# EAGLE board SDCARD_33_v2 (EAGLE 5.11)
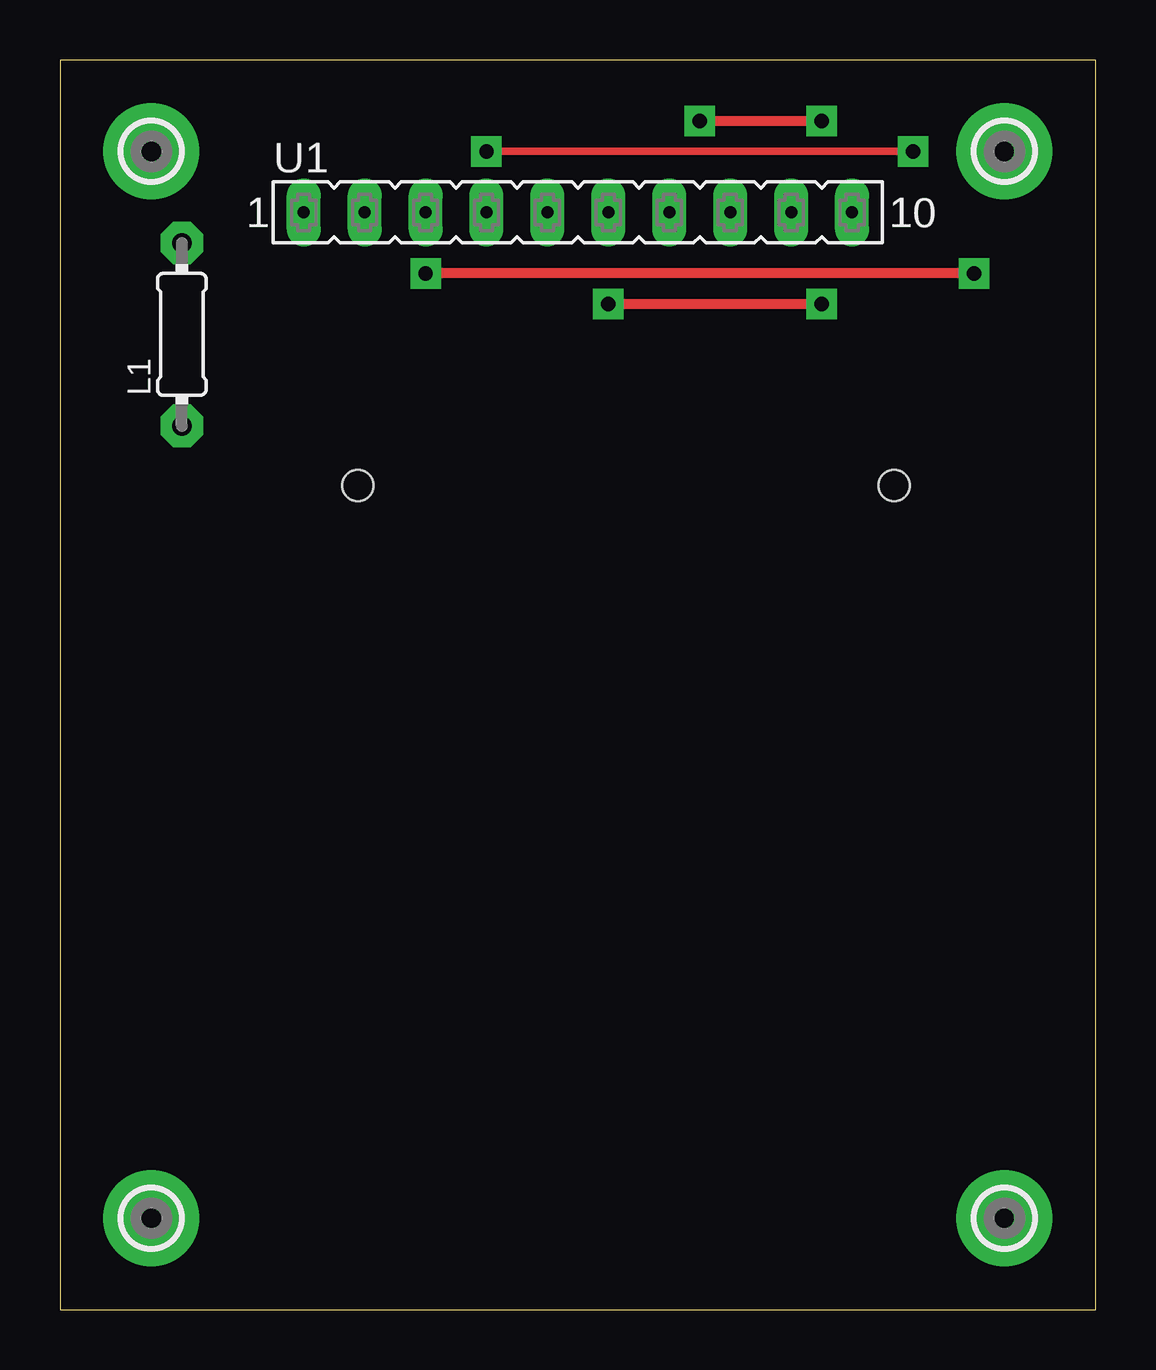
[diagram p0: board, top side]
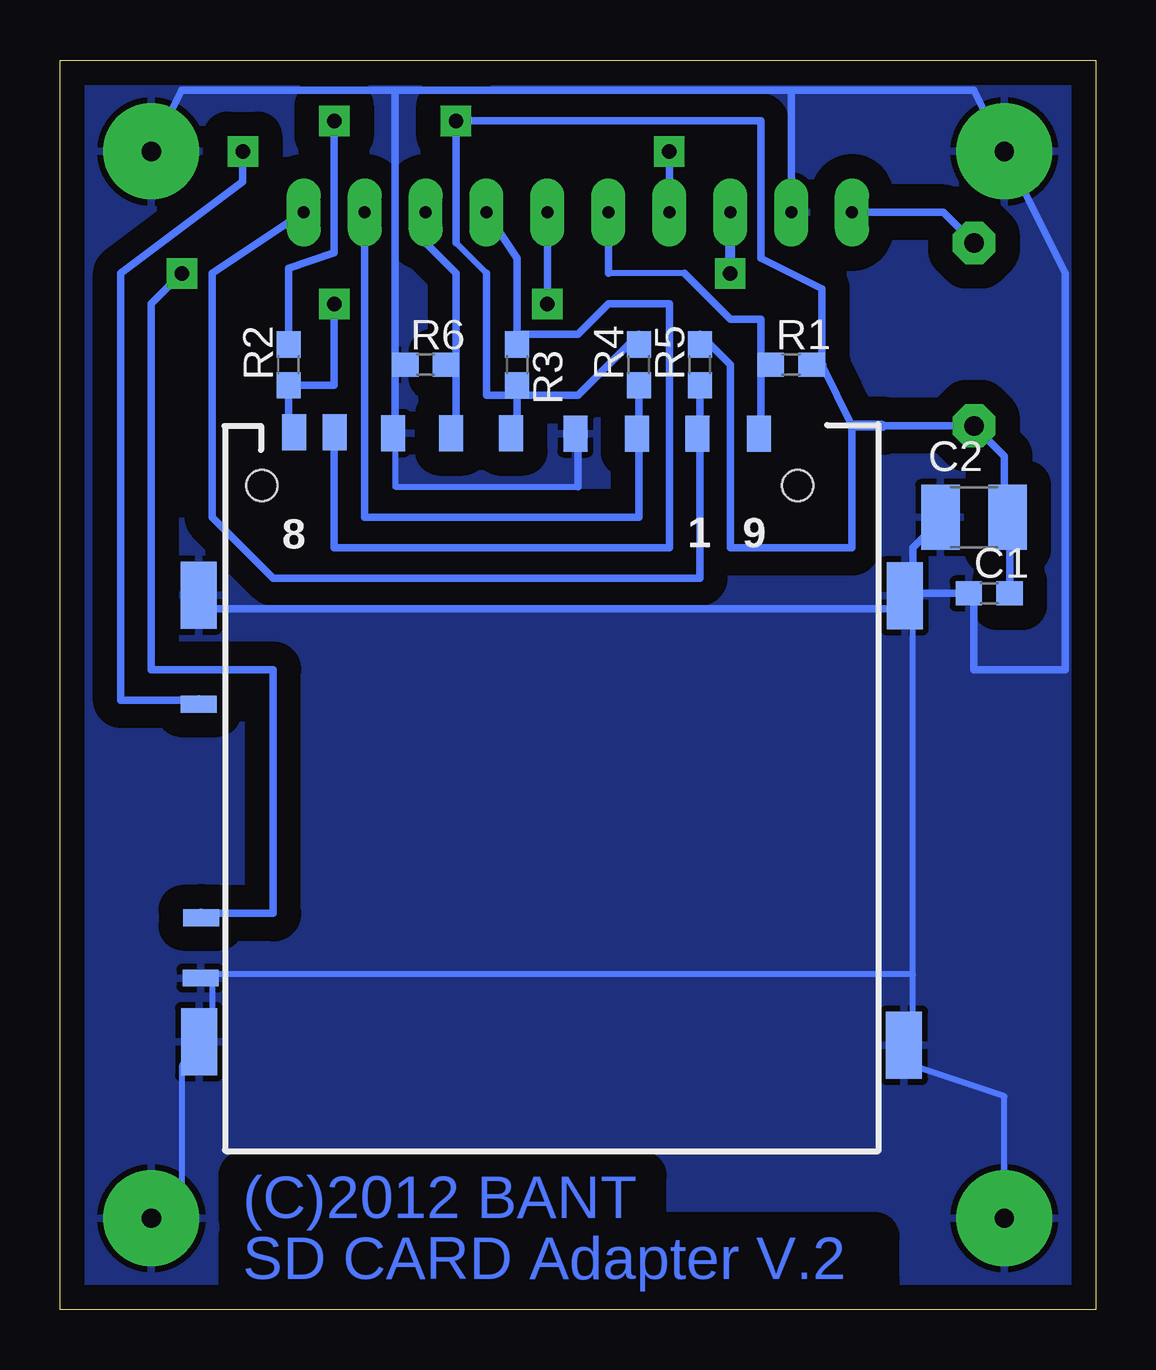
[diagram p1: board, bottom side, seen from below]

Size 43.18 x 52.07 mm. Coordinates in mm from the lower left corner, seen from the top.
Outline: 0,0 43.18,0 43.18,52.07 0,52.07 0,0
Copper layers (1*16): Top 0.035mm / dielectric 1.5mm / Bottom 0.035mm
Design rules "default": minimum track width 10mil, minimum drill 24mil, track to track 8mil, track to pad 8mil, pad to pad 8mil, via to via 8mil, smd to smd 8mil, copper to edge 40mil, drill to drill 8mil, minimum pad ring 10mil, minimum via ring 8mil, stop-mask expansion 4mil, vias tented up to drill 0mil, thermal gap 10mil

## Footprints (pad centres in the part's own frame; a part is rotated, then mirrored left to right if it is on the bottom)
C1608 = smd 1.1 x 1: 1 -0.85,0; 2 0.85,0
C3225 = smd 1.6 x 2.7: 1 -1.4,0; 2 1.4,0
DM1A-DSF-PEJ = smd 1 x 1.5: 1 6.263,16.174; 2 3.738,16.174; 3 1.161,16.178; 4 -1.516,16.205; 5 -4.016,16.205; 6 -6.44,16.205; 7 -8.865,16.231; 8 -10.565,16.231; 9 8.814,16.174 | smd 1.5 x 0.7: COM_TERM -14.462,-6.502; DETECT -14.532,4.902; WRT_PROT -14.437,-3.988 | smd 1.5 x 2.8: GND1 14.895,9.427; GND2 -14.549,9.452; GND3 -14.523,-9.152; GND4 14.859,-9.305 | hole 1.295: -11.913,14.021; 10.439,14.021
0204/7 = drill 0.813 pad 1.778 octagon: 1 -3.81,0; 2 3.81,0
PAD-2.1 = drill 0.8 pad 4 round: B2,1 0,0
CON-S10-1 = drill 0.5 pad 1.422 long: 1 1.27,1.27; 2 3.81,1.27; 3 6.35,1.27; 4 8.89,1.27; 5 11.43,1.27; 6 13.97,1.27; 7 16.51,1.27; 8 19.05,1.27; 9 21.59,1.27; 10 24.13,1.27

## Placement (x,y rotation side)
C1  0.1u  [C1608]  4.45,29.84 0 bottom
C2  4.7u  [C3225]  5.08,33.02 0 bottom
CON1  DM1A-DSF-PEJ  [DM1A-DSF-PEJ]  22.86,20.32 0 bottom
L1  10uH  [0204/7]  5.08,40.64 90 top
MT1  MOUNT1  [PAD-2.1]  3.81,3.81 0 top
MT2  MOUNT2  [PAD-2.1]  39.37,48.26 0 top
MT3  MOUNT3  [PAD-2.1]  3.81,48.26 0 top
MT4  MOUNT4  [PAD-2.1]  39.37,3.81 0 top
R1  47K  [C1608]  12.7,39.37 0 bottom
R2  47K  [C1608]  33.66,39.37 90 bottom
R3  47K  [C1608]  24.13,39.37 270 bottom
R4  47K  [C1608]  19.05,39.37 90 bottom
R5  47K  [C1608]  16.51,39.37 90 bottom
R6  47K  [C1608]  27.94,39.37 0 bottom
U1  CON-S8  [CON-S10-1]  8.89,44.45 0 top

## Library data of the parts
C1 C2 MT1-MT4 R1-R6 = MyLib
CON1 = sd-card
L1 = rcl
U1 = bant

## Nets
3.3V: L1.2 U1.1
!CS: CON1.1 R5.1 U1.10
GND: C1.1 C2.1 CON1.3 CON1.6 CON1.COM_TERM CON1.GND1 CON1.GND2 CON1.GND3 CON1.GND4 MT1.B2,1 MT2.B2,1 MT3.B2,1 MT4.B2,1 R6.1 U1.2
MISO: CON1.7 R3.1 U1.7
MOSI: CON1.2 R4.1 U1.9
N$1: CON1.DETECT U1.4
N$2: CON1.WRT_PROT U1.3
N$3: C1.2 C2.2 CON1.4 L1.1 R1.2 R2.2 R3.2 R4.2 R5.2
N$5: CON1.8 R2.1 U1.6
N$6: CON1.9 R1.1 U1.5
SCLK: CON1.5 R6.2 U1.8

## Tracks (layer width: path | path; a pad name or v marks a point on that pad's centre or on a via)
3.3V
  Bottom 0.305: L1.2 6.35,45.72 U1.1
!CS
  Bottom 0.254: 16.51,36.83 CON1.1
  Bottom 0.305: R5.1 16.51,36.83 16.51,30.48 34.29,30.48 36.83,33.02 36.83,43.18 U1.10
GND
  Bottom 0.254: 21.59,34.29 29.21,34.29 29.21,36.83 CON1.6 | 21.59,36.83 CON1.3 | 36.83,13.97 36.83,11.43 CON1.GND3 38.1,10.16 38.1,3.81 MT4.B2,1 | 6.35,33.02 C2.1 | 7.62,30.48 CON1.GND1 7.62,29.21 7.62,13.97 | MT1.B2,1 3.81,8.89 7.62,10.16 CON1.GND4 7.62,11.43 7.62,13.97 | 7.62,13.97 36.83,13.97 | 36.83,13.97 CON1.COM_TERM
  Bottom 0.305: 29.21,39.37 29.21,36.83 | 21.59,34.29 21.59,36.83 | 29.21,39.37 R6.1 | 6.35,33.02 7.62,31.75 7.62,30.48 | 29.21,50.8 38.1,50.8 MT2.B2,1 | 12.7,50.8 29.21,50.8 | 29.21,50.8 29.21,39.37 | 12.7,50.8 U1.2 | 7.62,29.21 37.41,29.21 | 12.7,50.8 5.08,50.8 MT3.B2,1 1.27,43.18 1.27,26.67 5.08,26.67 5.08,29.84 | 7.62,29.84 C1.1
  Bottom 0.406: 37.41,29.21 CON1.GND2 | C1.1 5.08,29.84 | 7.62,29.21 7.62,29.84
  pour Bottom (isolate 1.016): 0,52.07 0,0 43.18,0 43.18,52.07
MISO
  Bottom 0.254: 24.13,40.64 R3.1 | 31.75,36.83 CON1.7
  Bottom 0.305: U1.7 24.13,43.81 24.13,40.64 21.59,40.64 20.32,41.91 17.78,41.91 17.78,31.75 31.75,31.75 31.75,36.83
MOSI
  Bottom 0.254: 19.05,36.83 CON1.2
  Bottom 0.305: R4.1 19.05,36.83 19.05,33.02 30.48,33.02 U1.9
N$1  (via drill 0.6 pad 1.27)
  Top 0.305: v35.56,48.26 v17.78,48.26
  Bottom 0.305: v17.78,48.26 U1.4 | v35.56,48.26 35.56,46.99 40.64,43.18 40.64,25.4 37.39,25.4
  Bottom 0.406: CON1.DETECT 37.39,25.4
N$2  (via drill 0.6 pad 1.27)
  Top 0.406: v38.1,43.18 v15.24,43.18
  Bottom 0.305: v38.1,43.18 39.37,41.91 39.37,26.67 34.29,26.67 34.29,16.51 37.3,16.51
  Bottom 0.406: v15.24,43.18 U1.3 | 37.3,16.51 CON1.WRT_PROT
N$3  (via drill 0.6 pad 1.27)
  Top 0.406: v26.67,49.53 v31.75,49.53
  Bottom 0.254: 24.13,36.83 CON1.4 | 19.05,40.64 R4.2 | 16.51,40.64 R5.2 | 3.81,33.02 C2.2 | 26.67,44.45 25.4,43.18 | 24.13,38.1 R3.2
  Bottom 0.305: 24.13,38.1 24.13,36.83 | 19.05,40.64 21.59,38.1 24.13,38.1 | 8.89,36.83 L1.1 3.81,35.56 3.81,33.02 | 16.51,40.64 15.24,39.37 15.24,31.75 10.16,31.75 10.16,36.83 11.43,39.37 11.43,42.55 13.97,43.81 13.97,49.53 v26.67,49.53 26.67,44.45 | 24.13,38.1 25.4,38.1 25.4,43.18 | C1.2 3.6,33.02 | R2.2 33.66,43.4 31.75,44.03 v31.75,49.53
  Bottom 0.406: 3.6,33.02 3.81,33.02 | 8.89,36.83 10.16,36.83 | 11.43,39.37 R1.2
N$5  (via drill 0.6 pad 1.27)
  Top 0.406: v22.86,41.91 v31.75,41.91
  Bottom 0.305: 33.66,36.55 R2.1 31.75,38.52 v31.75,41.91 | v22.86,41.91 U1.6
  Bottom 0.406: 33.66,36.55 CON1.8
N$6
  Bottom 0.254: CON1.9 13.97,36.83 | 17.14,43.18 20.32,43.18 | 13.97,39.37 R1.1
  Bottom 0.305: 13.97,36.83 13.97,39.37 13.97,41.27 15.24,41.27 17.14,43.18 | 20.32,43.18 U1.5
SCLK
  Bottom 0.254: CON1.5 26.67,36.83 | 27.94,44.45 U1.8 | 26.67,39.37 R6.2
  Bottom 0.305: 26.67,36.83 26.67,39.37 26.67,43.18 27.94,44.45

## Text on the board
Bottom: (C)2012 BANT | SD CARD Adapter V.2